# Altium PCB PCB1.PcbDoc
Units mm, origin at the board's own origin, x right, y up, seen from the top; angles counter-clockwise.
Board outline 152.4 x 101.6 mm, 2 copper layers (Top Layer, Bottom Layer); 4 components, 6 nets, 18 pads, 1 vias.
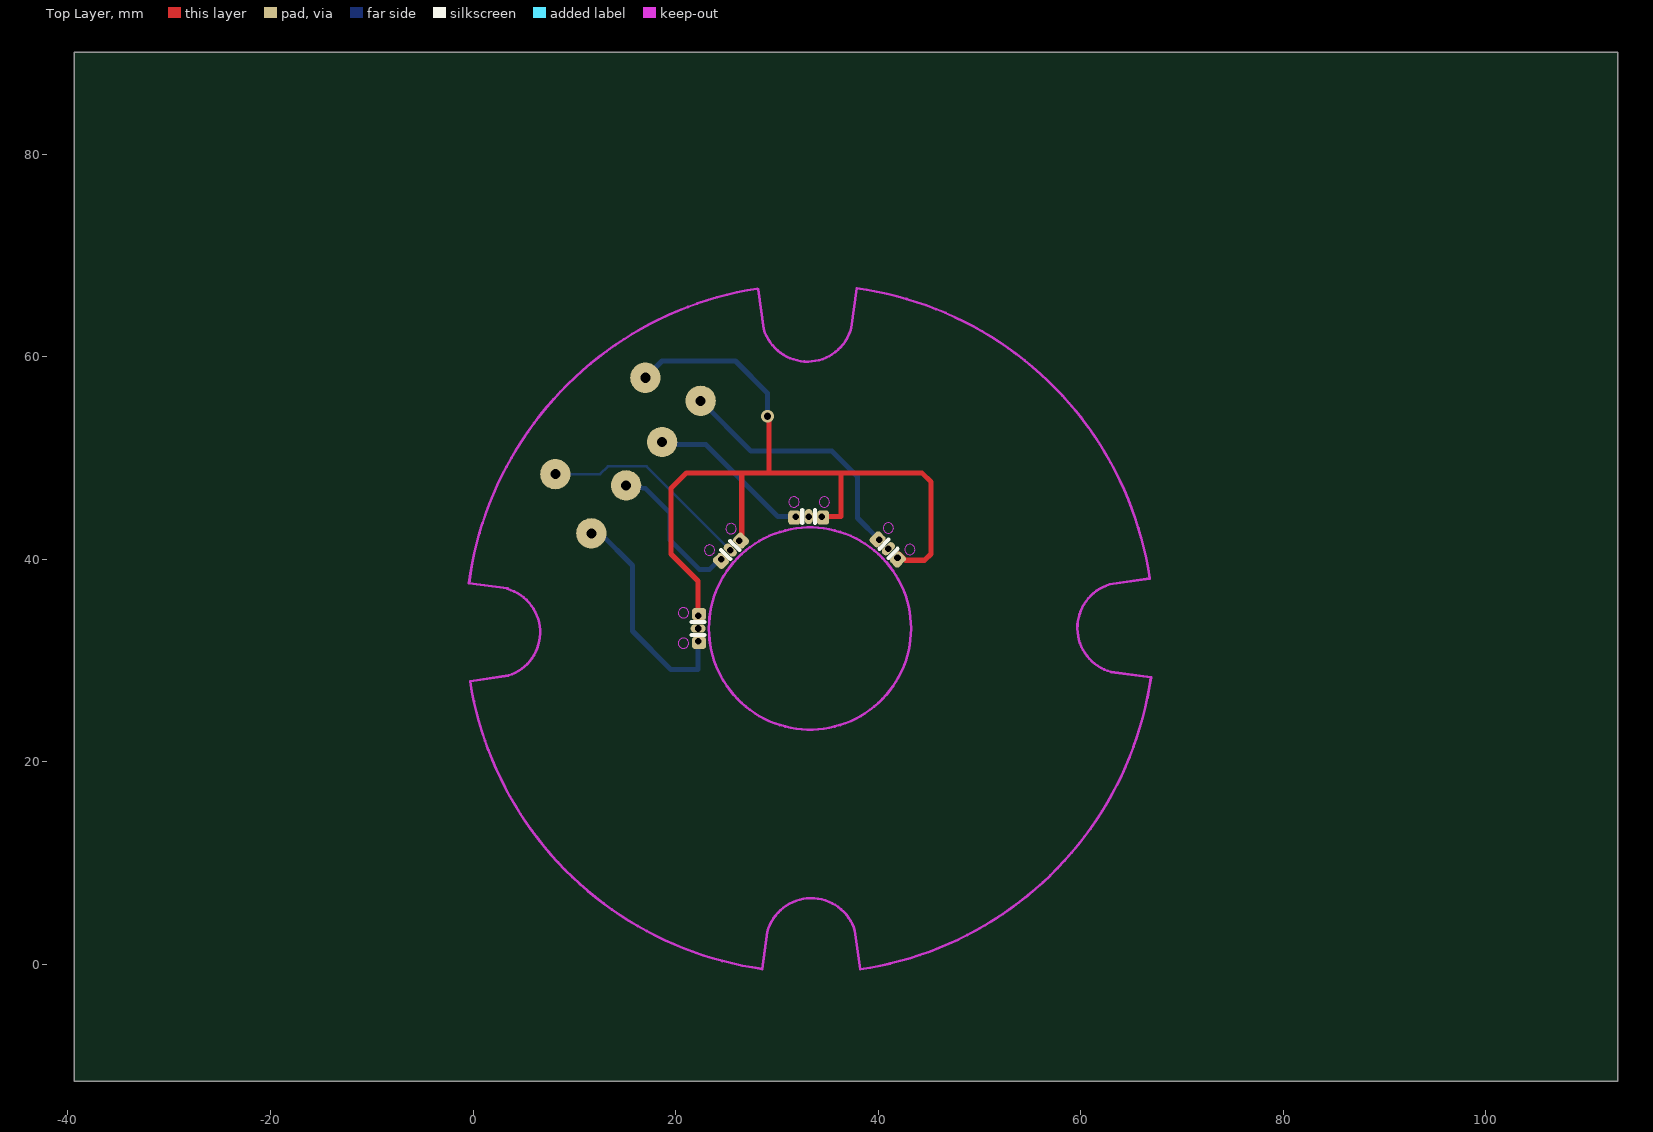
[diagram p0: Top Layer view]
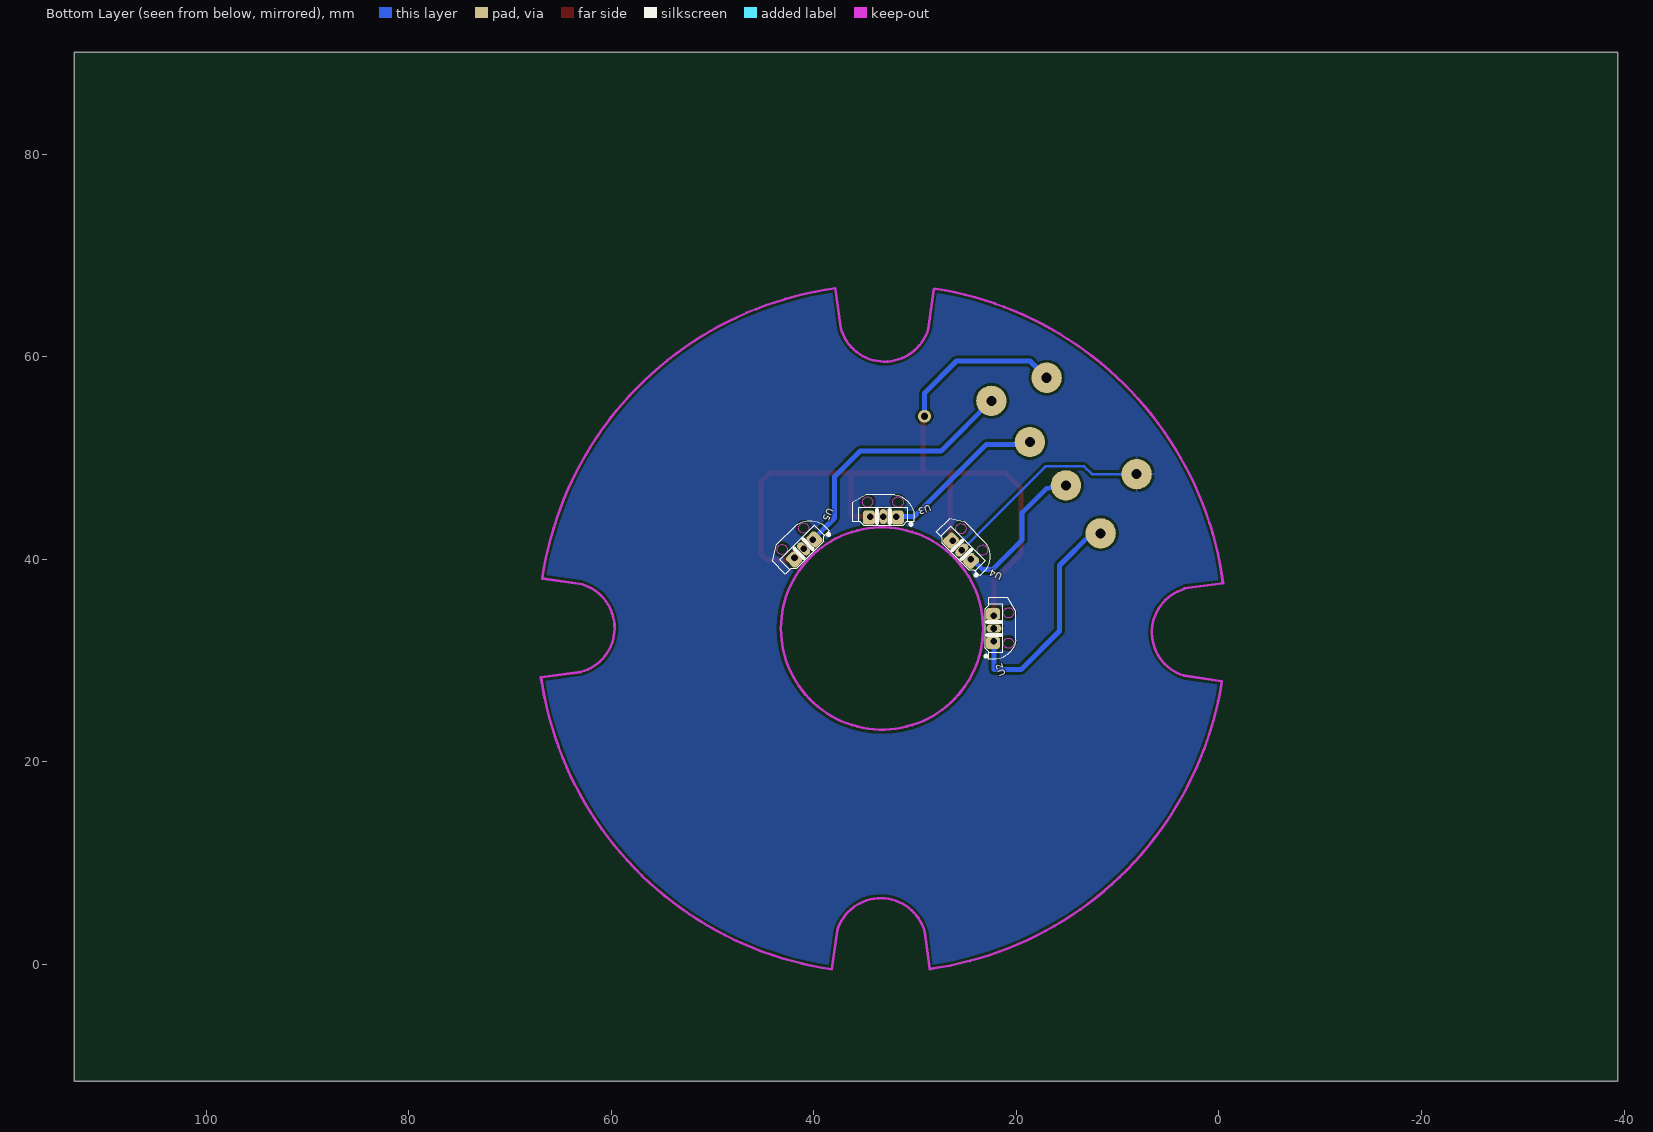
[diagram p1: Bottom Layer view, seen from below]

## Layer stack, top to bottom
Top Solder: solder mask 0.0102, Solder Resist, Dk 3.5
Top Layer: signal copper 0.0356
Dielectric 1: dielectric 0.32, FR-4, Dk 4.8
Bottom Layer: signal copper 0.0356
Bottom Solder: solder mask 0.0102, Solder Resist, Dk 3.5

## Board outline
-39.37,-11.557 113.03,-11.557 113.03,90.043 -39.37,90.043

## Design rules (kind name [scope] priority, off if disabled: settings)
Clearance [All] p1: gap=0.254 ignorepadtopadclearanceinfootprint=FALSE except(0: Arc-Hole Track-Hole SMDPad-Hole THPad-Hole Via-Hole Fill-Hole Poly-Hole Region-Hole Text-Hole)
PolygonConnect [All] p1: connectstyle=Relief reliefconductorwidth=0.254 reliefentries=4 polygonreliefangle="90 Angle" airgapwidth=0.254
RoutingVias [All] p1: holewidth=0.711 width=1.27 viastyle="Through Hole" minholewidth=0.711 minwidth=1.27 maxholewidth=0.711 maxwidth=1.27
SolderMaskExpansion [All] p1: expansion=0.102
Width [All] p1: maxlimit=1 minlimit=0.254 preferedwidth=0.254
30 further rules are at their usual default settings.

## Components (designator, comment, footprint, x,y, rotation, side; value= is the part's Value field where it differs from the comment)
U2 "HALL" "Sensor-1.27+ holder 3" 22.225,33.147 r90 bottom
U3 "HALL" "Sensor-1.27+ holder 3" 33.147,44.196 r0 bottom (schematic designator U2)
U4 "HALL" "Sensor-1.27+ holder 3" 25.4,40.894 r45 bottom (schematic designator U2)
U5 "HALL" "Sensor-1.27+ holder 3" 41.021,41.021 r315 bottom (schematic designator U2)

## Footprints (in the part's own frame and the unit in brackets; to place one, negate y for a bottom-side part, rotate by r counter-clockwise, add the part's x,y. Pads: shape width x height; smd on the part's side, far side on the other; paste and mask are expansions set on the pad)
"Sensor-1.27+ holder 3" [mm] "Holder 3*6mm"
  rrect50% 1.2x1.4 hole 0.65 copper offset 0.15,0.1: 1(1.27,0)
  oval 0.8x1.5 hole 0.65: 2(0,0)
  rrect50% 1.2x1.4 hole 0.65 copper offset -0.15,0.1: 3(-1.27,0)
  Keep-Out Layer circle w0.05: c1.548,-1.442 r0.51
  Keep-Out Layer circle w0.05: c-1.452,-1.442 r0.51
  silkscreen extent -3.05,-2.17 3.05,0.89

## Part data
U2 U3 U4 U5: "HALL US1881"

## Free pads (board coordinates)
  round 3 hole 1: 2(8.128,48.387) 2(11.684,42.545) 2(15.113,47.28) 2(17.018,57.912) 2(18.669,51.562) 2(22.479,55.626)

## Via types
v1: diameter 1.27, hole 0.711, Top Layer to Bottom Layer, 1 vias

## Nets (pads, with @x,y where several pads share a name; then routed paths per layer and width w, separated by ;. In a path a pad name is that pad's centre, name@x,y a point inside that pad or via, vN(x,y) a via of type N, cw(c..) or ccw(c..) an arc to the next point about the centre after c; other vN are vias at no path point)
1: pad.2@11.684,42.545 U2.3 | length 22.7
  Bottom Layer w0.5: pad.2@11.684,42.545 12.573,42.545 15.748,39.37 15.748,32.893 19.558,29.083 22.225,29.083 U2.3
2: pad.2@15.113,47.28 U4.3 | length 15.2
  Bottom Layer w0.5: pad.2@14.605,47.371 15.113,47.28 17.018,46.99 19.431,44.577 19.431,41.91 22.352,38.989 23.368,38.989 24.375,39.996 U4.3
3: pad.2@18.669,51.562 U3.3 | length 16.4
  Bottom Layer w0.5: pad.2@18.669,51.562 18.669,51.308 22.987,51.308 30.099,44.196 U3.3
4: pad.2@22.479,55.626 U5.3 | length 25.7
  Bottom Layer w0.5: pad.2@22.479,55.626 27.432,50.673 35.433,50.673 37.973,48.133 37.973,44.069 U5.3
GND: pad.2@8.128,48.387 U2.2 U4.2 U5.2 | length 22.5
  Bottom Layer w0.254: pad.2@8.128,48.387 12.541,48.387 13.315,49.161 17.133,49.161 U4.2@25.68,40.614 ; U2.2 U2.2@22.575,33.147 ; U4.2@25.647,40.582 U4.2@25.68,40.614 ; U4.2@25.712,40.647 U4.2@25.68,40.614 ; U5.2@40.499,40.647 40.873,41.021 U5.2
VCC: pad.2@17.018,57.912 U2.1 U3.1 U4.1 U5.1 | length 86.1
  Top Layer w0.5: U2.1 22.225,37.846 19.558,40.513 19.558,46.99 21.082,48.514 26.534,48.514 ; U4.1 26.534,42.028 26.534,48.514 ; v1@29.21,54.102 29.21,48.514 ; U3.1 36.322,44.196 36.322,48.514 ; U5.1@42.076,40.507 42.696,39.887 44.586,39.887 45.212,40.513 45.212,47.625 44.323,48.514 36.322,48.514 ; 26.534,48.514 29.21,48.514 ; 29.21,48.514 36.322,48.514
  Bottom Layer w0.5: pad.2@17.018,57.912 18.669,59.563 25.908,59.563 29.083,56.388 v1(29.083,54.102)
pads on no net: U3.2

## Polygon pours and split planes (outlines as drawn)
GND on Bottom Layer (solid, remove dead copper, pour order 0): -8.001,75.184 -3.556,70.739 65.786,70.739 79.248,57.277 70.993,49.022 70.993,-7.874 -5.334,-7.874 -12.827,-0.381 -11.43,1.016 -11.43,57.658

## Keep-outs
Keep-Out Layer:
  circle w0.254: c33.274,33.147 r9.981
  lines w0.254: 3.395,37.06 cw(c2.159,32.766) 3.504,28.505 -0.273,27.937 ccw(c33.274,33.147) 28.579,-0.476 29.061,3.178 cw(c33.401,2.032) 37.707,3.299 ; 3.409,37.109 -0.398,37.594 cw(c33.274,33.147) 28.062,66.709 28.179,66.62 28.705,62.717 ; 28.711,62.719 ccw(c33.017,63.987) 37.357,62.841 37.872,66.745 cw(c33.274,33.147) 66.823,38.084 62.859,37.504 ccw(c64.185,33.198) 62.995,28.853 66.947,28.318 cw(c33.274,33.147) 38.227,-0.508 37.713,3.301

## Silkscreen, mask and mechanical layers (free items; w line width, h text height)
Mechanical 1:
  circle w0.013: c33.274,33.138 r10
  lines w0.013: 28.148,66.765 28.705,63.016 ; 37.359,63.07 37.884,66.802 ; -0.426,37.645 cw(c33.274,33.138) 28.063,66.736 28.685,62.729 ccw(c33.004,63.992) 37.338,62.783 37.892,66.823 cw(c33.274,33.138) 66.911,38.093 62.935,37.507 ccw(c64.198,33.188) 62.989,28.853 66.926,28.286 cw(c33.274,33.138) 38.27,-0.493 37.713,3.257 ccw(c33.394,1.993) 29.06,3.202 28.534,-0.53 cw(c33.274,33.138) -0.318,27.887 3.463,28.478 ccw(c2.2,32.797) 3.408,37.132 -0.426,37.645